# EAGLE board x-jalad rev2 (EAGLE 6.4)

Size 100 x 81 mm. Coordinates in mm from the lower left corner, seen from the top.
Outline: 0,0 64.5,0 100,81 0,80 0,0
Copper layers (1*16): Top 0.035mm / dielectric 1.5mm / Bottom 0.035mm
Design rules "default": minimum track width 10mil, minimum drill 24mil, track to track 8mil, track to pad 8mil, pad to pad 8mil, via to via 8mil, smd to smd 8mil, copper to edge 40mil, drill to drill 8mil, minimum pad ring 10mil, minimum via ring 8mil, stop-mask expansion 4mil, vias tented up to drill 0mil, thermal gap 10mil

## Footprints (pad centres in the part's own frame; a part is rotated, then mirrored left to right if it is on the bottom)
DFN10 = smd 0.65 x 0.3: ENBA 0.4,2; ENBB 0.4,1; GND 0.4,1.5; INA 0.4,2.5; INB 0.4,0.5; NC 3.5,1; NC2 3.5,1.5; OUTA 3.5,2.5; OUTB 3.5,0.5; STAT 3.5,2 | smd 1.55 x 2.48: GND2 1.95,1.5
C0402 = smd 0.7 x 0.9: 1 -0.65,0; 2 0.65,0
C0603 = smd 1.1 x 1: 1 -0.85,0; 2 0.85,0
USB-MINIB = smd 0.5 x 2.308: D+ 0,4.064; D- -0.8,4.064; GND 1.6,4.064; ID 0.8,4.064; VBUS -1.6,4.064 | smd 2 x 2.4: GND1 -4.4,-2; GND2 -4.4,3.5; GND3 4.4,3.5; GND4 4.4,-2 | hole 1: -2.2,1; 2.2,1
0603 = smd 1.1 x 1: 1 -0.85,0; 2 0.85,0
1X02/90 = drill 1.016 long: 1 -1.27,-3.81; 2 1.27,-3.81
SOT23-5 = smd 0.55 x 1.2: EN -1.59,1.24; GND -2.54,1.24; IN -3.49,1.24; NR/FB -1.59,3.84; OUT -3.49,3.84
LD260 = drill 0.813 octagon: A -1.27,0; K 1.27,0
FC-12M = smd 0.7 x 1.4: 1 -0.85,0; 2 0.85,0
R0402 = smd 0.7 x 0.9: 1 -0.65,0; 2 0.65,0
MSOP8 = smd 0.45 x 1: GND 0.975,-2.05; SCL 0.325,2.05; SDA 0.975,2.05; SQW -0.325,2.05; VBAT 0.325,-2.05; VCC -0.975,2.05; X1 -0.975,-2.05; X2 -0.325,-2.05
MICROSD_HRS = smd 0.8 x 1.75: 1 8.2,0.9; 2 7.1,0.9; 3 6,0.9; 4 4.9,0.9; 5 3.8,0.9; 6 2.7,0.9; 7 1.6,0.9; 8 0.5,0.9 | smd 0.8 x 1.5: GND0 -0.95,8.5 | smd 0.8 x 1.4: GND1 11,9.25 | smd 1.45 x 1: S0 -0.6,10.05 | smd 1 x 1.55: S1 10.45,11.7
TQFP44 = smd 1.5 x 0.5: 1 -5.8,4; 2 -5.8,3.2; 3 -5.8,2.4; 4 -5.8,1.6; 5 -5.8,0.8; 6 -5.8,0; 7 -5.8,-0.8; 8 -5.8,-1.6; 9 -5.8,-2.4; 10 -5.8,-3.2; 11 -5.8,-4; 23 5.8,-4; 24 5.8,-3.2; 25 5.8,-2.4; 26 5.8,-1.6; 27 5.8,-0.8; 28 5.8,0; 29 5.8,0.8; 30 5.8,1.6; 31 5.8,2.4; 32 5.8,3.2; 33 5.8,4 | smd 0.5 x 1.5: 12 -4,-5.8; 13 -3.2,-5.8; 14 -2.4,-5.8; 15 -1.6,-5.8; 16 -0.8,-5.8; 17 0,-5.8; 18 0.8,-5.8; 19 1.6,-5.8; 20 2.4,-5.8; 21 3.2,-5.8; 22 4,-5.8; 34 4,5.8; 35 3.2,5.8; 36 2.4,5.8; 37 1.6,5.8; 38 0.8,5.8; 39 0,5.8; 40 -0.8,5.8; 41 -1.6,5.8; 42 -2.4,5.8; 43 -3.2,5.8; 44 -4,5.8
SMDRESONATOR = smd 1.4 x 4.1: GND 2.5,0 | smd 1.2 x 4.1: X1 0,0; X2 5,0
DFN10' = smd 0.65 x 0.3: GND 3.5,1.5; GND2 3.5,2; NC 0.4,0.5; NC2 3.5,0.5; PROG 3.5,2.5; STAT 3.5,1; VBAT 0.4,1.5; VBAT2 0.4,1; VDD 0.4,2.5; VDD2 0.4,2 | smd 1.55 x 2.48: GND3 1.95,1.5
SMD_BUTTON = smd 0.8 x 1.7: P$1 0,0; P$2 3.6,0
SOT23-3 = smd 1 x 1.4: GND 0,1.1; RST -0.95,-1.1; VIN 0.95,-1.1
3,17/1,3 = drill 1.321 pad 3.175 octagon: 1 0,0

## Placement (x,y rotation side)
2CH_IDEAL_DIODES  LTC4413EDD-1  [DFN10]  53.25,27 180 top
C1  4.7uF  [C0402]  79,53.75 270 bottom
C3  100nF  [C0402]  82.25,50.75 270 top
C4  4u7  [C0402]  70.75,52.5 90 top
C5  4.7 uF  [C0603]  88.75,54.25 90 bottom
C8  1uF  [C0402]  48,52 0 top
C11  100nF  [C0402]  17.5,43 180 top
C12  100nF  [C0402]  16.75,40.25 180 top
C14  100nF  [C0402]  52.25,50.25 270 top
C15  100nF  [C0402]  56,50 180 top
C16  100nF  [C0402]  17.25,38 0 top
C17  100nF  [C0402]  17.5,35.5 0 top
CN1  [USB-MINIB]  3.5,12.75 270 top
F1  PTC0603  [0603]  81.25,57.5 180 top
JP1  [1X02/90]  23.5,28 0 top
LDO  TPS73130DBVT  [SOT23-5]  17.41,6.59 90 top
LED1  [LD260]  2.5,24.75 90 top
LED2  [LD260]  56,17.75 90 top
LED3  [LD260]  56,4.75 90 top
LED5  [LD260]  55.5,10.75 90 top
Q1  FC-12M  [FC-12M]  45.75,52.75 180 bottom
R1  10k  [R0402]  47,62 90 bottom
R2  10k  [R0402]  45.25,62 90 bottom
R3  10k  [R0402]  44,61.5 90 bottom
R4  1k  [R0402]  66,65.25 0 top
R5  1k  [R0402]  71.25,65.5 0 top
R6  1k  [R0402]  75.25,64.75 0 top
R7  1k  [R0402]  43.75,72 0 top
R8  1k2  [R0402]  86.75,52 0 bottom
R9  10k  [R0402]  43,53.5 0 top
R10  22  [R0402]  81.25,60.5 0 top
R11  10k  [R0402]  61.25,47.25 0 top
R12  22  [R0402]  81.25,59.25 0 top
R13  1k  [R0402]  85.75,53.5 0 bottom
R14  10k  [R0402]  60.5,50.5 0 top
R15  10k  [R0402]  49,70 0 top
RTC  DS1339U-33+  [MSOP8]  11.25,18.82 0 bottom
U$1  MICROSD_HRS  [MICROSD_HRS]  21,69 180 top
U$2  ATMEGA32U4-AU  [TQFP44]  32.25,14.75 270 bottom
U$3  CSTCC8M00G53  [SMDRESONATOR]  43.25,18.25 270 bottom
U$4  MCP73123-22SI/MF  [DFN10']  62.25,26 180 top
U$5  B3U-1000P  [SMD_BUTTON]  49.25,73 90 top
U$6  MCP101T-315I/TT  [SOT23-3]  79.25,48.75 180 top
U$7  B3U-1000P  [SMD_BUTTON]  14.25,11.75 0 bottom
VREF1  [3,17/1,3]  37.75,66.75 0 top
VREF2  [3,17/1,3]  37.75,60.75 0 top
VREF3  [3,17/1,3]  37.75,54.75 0 top
VREF4  [3,17/1,3]  37.75,48.75 0 top

## Library data of the parts
2CH_IDEAL_DIODES = 2_ch_ideal_diode
C1 C3 C4 C8 C11 C12 C14-C17 = eagle-ltspice; SPICEMODEL: NONE; SPICEPREFIX: C
C5 = rcl
CN1 U$2 = adafruit
F1 = SparkFun
JP1 = pinhead
LDO = TPS73130DBVT
LED1-LED3 LED5 = led
Q1 = crystal
R1-R15 = eagle-ltspice; SPICEMODEL: NONE; SPICEPREFIX: R
RTC = DS1339U-33+
U$1 = custom
U$3 = smd_resonator
U$4 = mcp73123-22si
U$5 U$7 = smd_button
U$6 = MCP101T-315I
VREF1-VREF4 = wirepad

## Nets
+3V3: 2CH_IDEAL_DIODES.INA C1.2 C3.2 JP1.2 RTC.VBAT U$4.VBAT U$6.VIN
+5V: 2CH_IDEAL_DIODES.INB C5.1 F1.2 R13.1 U$4.VDD U$4.VDD2
GND: 2CH_IDEAL_DIODES.ENBB 2CH_IDEAL_DIODES.GND 2CH_IDEAL_DIODES.GND2 C1.1 C3.1 C4.1 C5.2 C8.2 C11.2 C12.2 C14.1 C15.1 C16.1 C17.1 CN1.GND JP1.1 LDO.GND LED1.K LED2.K LED3.K LED5.K R8.1 R14.2 RTC.GND U$1.6 U$1.GND0 U$1.GND1 U$1.S0 U$1.S1 U$2.5 U$2.15 U$2.23 U$2.35 U$2.43 U$3.GND U$4.GND U$4.GND2 U$4.GND3 U$5.P$1 U$6.GND U$7.P$2 VREF2.1 VREF4.1
LED0: R7.2 U$2.27
LED1: R6.2 U$2.26
LED2: R5.2 U$2.22
LED3: R4.2 U$2.25
MISO: U$1.7 U$2.11
MOSI: U$1.3 U$2.10
N$1: LED5.A R7.1
N$3: LED1.A R4.1
N$4: R8.2 U$4.PROG
N$5: LED2.A R5.1
N$6: LED3.A R6.1
N$16: Q1.1 RTC.X2
N$17: CN1.VBUS F1.1
N$18: CN1.D+ R10.2
N$19: CN1.D- R12.2
N$20: Q1.2 RTC.X1
N$21: C14.2 U$2.42
NRST: R15.1 U$2.13 U$5.P$2
NRST1: R9.1 U$2.33 U$7.P$1
PB4: R13.2 U$2.28 U$4.STAT
S0_ADC: U$2.41 VREF1.1
S1_ADC: U$2.40 VREF3.1
SCK: U$1.5 U$2.9
SCL: R2.1 RTC.SCL U$2.18
SDA: R3.1 RTC.SDA U$2.19
SQW: R1.1 RTC.SQW U$2.21
SS: U$1.2 U$2.8
TRGGR: 2CH_IDEAL_DIODES.ENBA U$6.RST
USB_D+: R10.1 U$2.4
USB_D-: R12.1 U$2.3
V_ADC: R11.2 R14.1 U$2.39
VCC: C8.1 C11.1 C12.1 C15.2 C16.2 C17.2 LDO.OUT R1.2 R2.2 R3.2 R9.2 R15.2 RTC.VCC U$1.4 U$2.6 U$2.7 U$2.14 U$2.24 U$2.34 U$2.44
VCC/2: 2CH_IDEAL_DIODES.OUTA 2CH_IDEAL_DIODES.OUTB C4.2 LDO.IN R11.1
XTAL1: U$2.17 U$3.X1
XTAL2: U$2.16 U$3.X2

## Tracks (layer width: path | path; a pad name or v marks a point on that pad's centre or on a via)
+3V3  (6 unrouted)
+5V  (5 unrouted)
GND  (42 unrouted)
LED0  (1 unrouted)
LED1  (1 unrouted)
LED2  (1 unrouted)
LED3  (1 unrouted)
MISO  (1 unrouted)
MOSI  (1 unrouted)
N$1  (1 unrouted)
N$3  (1 unrouted)
N$4  (1 unrouted)
N$5  (1 unrouted)
N$6  (1 unrouted)
N$16  (1 unrouted)
N$17  (1 unrouted)
N$18  (1 unrouted)
N$19  (1 unrouted)
N$20  (1 unrouted)
N$21  (1 unrouted)
NRST  (2 unrouted)
NRST1  (2 unrouted)
PB4  (2 unrouted)
S0_ADC  (1 unrouted)
S1_ADC  (1 unrouted)
SCK  (1 unrouted)
SCL  (2 unrouted)
SDA  (2 unrouted)
SQW  (2 unrouted)
SS  (1 unrouted)
TRGGR  (1 unrouted)
USB_D+  (1 unrouted)
USB_D-  (1 unrouted)
V_ADC  (2 unrouted)
VCC  (19 unrouted)
VCC/2  (4 unrouted)
XTAL1  (1 unrouted)
XTAL2  (1 unrouted)